# EAGLE board bottom (EAGLE 9.6.1)
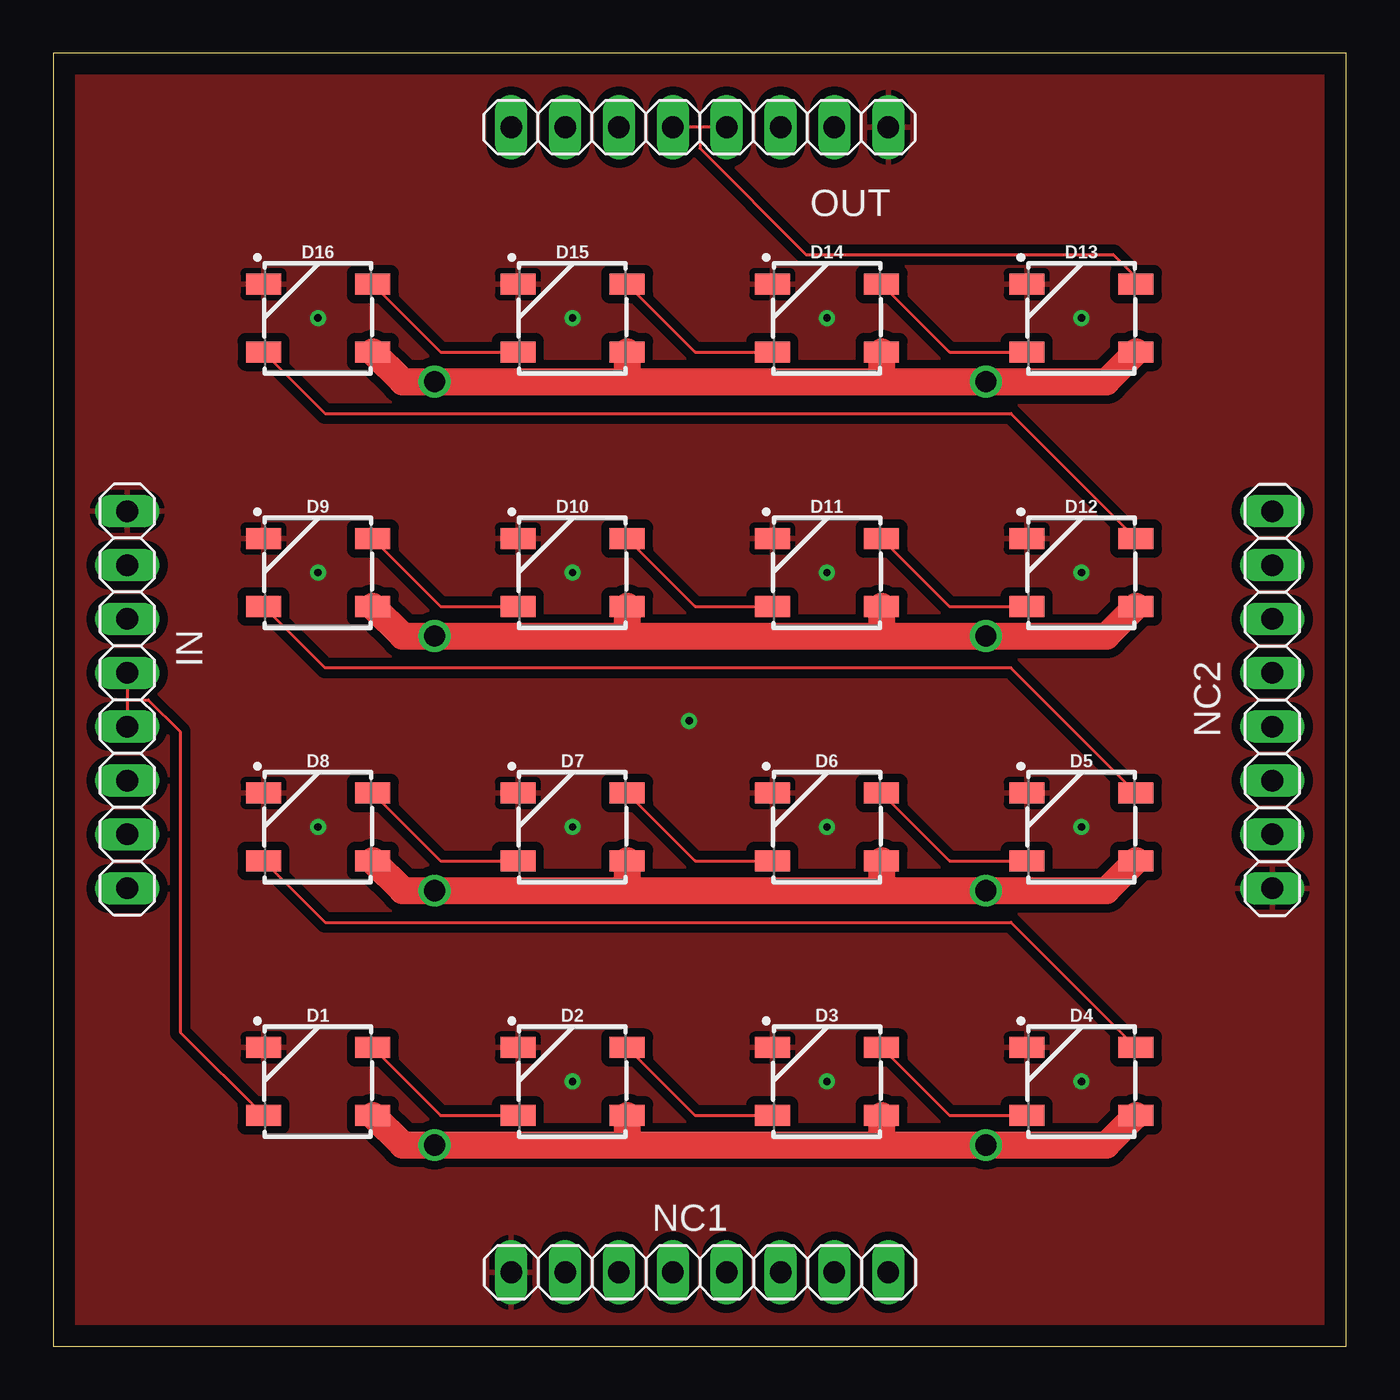
[diagram p0: board, top side]
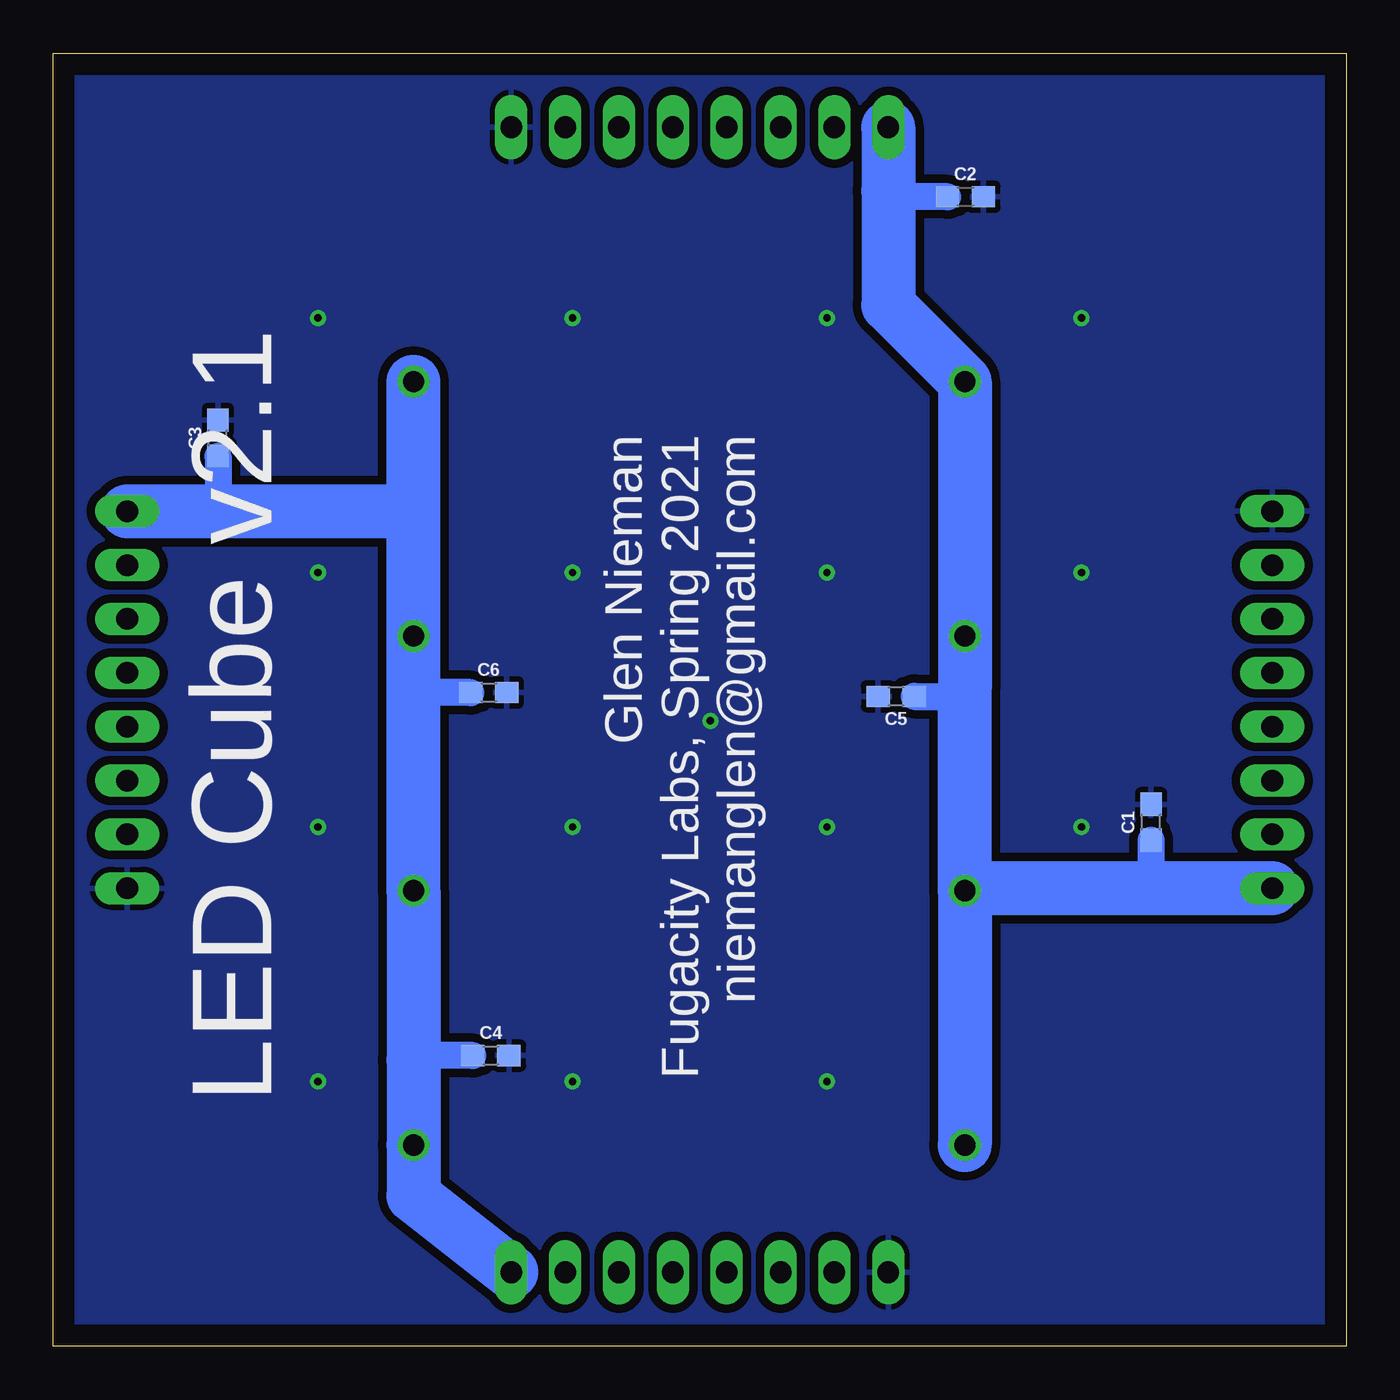
[diagram p1: board, bottom side, seen from below]

Size 61 x 61 mm. Coordinates in mm from the lower left corner, seen from the top.
Outline: 0,0 61,0 61,61 0,61 0,0
Copper layers (1*16): Top 0.035mm / dielectric 1.5mm / Bottom 0.035mm
Design rules "default *": minimum track width 6mil, minimum drill 0.35mm, track to track 6mil, track to pad 6mil, pad to pad 6mil, via to via 6mil, smd to smd 6mil, copper to edge 40mil, drill to drill 6mil, minimum pad ring 10mil, minimum via ring 8mil, stop-mask expansion 4mil, vias tented up to drill 100mil, thermal gap 10mil
Net classes: 1 pow_width: width 0.102 mm

## Footprints (pad centres in the part's own frame; a part is rotated, then mirrored left to right if it is on the bottom)
0603 = smd 1.1 x 1: 1 -0.85,0; 2 0.85,0
WS2812B = smd 1.651 x 1: 1 2.577,-1.6; 2 2.577,1.6; 3 -2.577,1.6; 4 -2.577,-1.6
1X08 = drill 1.016 long: 1 -8.89,0; 2 -6.35,0; 3 -3.81,0; 4 -1.27,0; 5 1.27,0; 6 3.81,0; 7 6.35,0; 8 8.89,0

## Placement (x,y rotation side)
C1  0.1uF  [0603]  9.22,24.72 90 bottom
C2  0.1uF  [0603]  17.97,54.22 0 bottom
C3  0.1uF  [0603]  53.22,42.84 90 bottom
C4  0.1uF  [0603]  40.35,13.72 0 bottom
C5  0.1uF  [0603]  21.24,30.66 180 bottom
C6  0.1uF  [0603]  40.45,30.84 0 bottom
D1  WS2812B  [WS2812B]  12.5,12.5 0 top
D2  WS2812B  [WS2812B]  24.5,12.5 0 top
D3  WS2812B  [WS2812B]  36.5,12.5 0 top
D4  WS2812B  [WS2812B]  48.5,12.5 0 top
D5  WS2812B  [WS2812B]  48.5,24.5 0 top
D6  WS2812B  [WS2812B]  36.5,24.5 0 top
D7  WS2812B  [WS2812B]  24.5,24.5 0 top
D8  WS2812B  [WS2812B]  12.5,24.5 0 top
D9  WS2812B  [WS2812B]  12.5,36.5 0 top
D10  WS2812B  [WS2812B]  24.5,36.5 0 top
D11  WS2812B  [WS2812B]  36.5,36.5 0 top
D12  WS2812B  [WS2812B]  48.5,36.5 0 top
D13  WS2812B  [WS2812B]  48.5,48.5 0 top
D14  WS2812B  [WS2812B]  36.5,48.5 0 top
D15  WS2812B  [WS2812B]  24.5,48.5 0 top
D16  WS2812B  [WS2812B]  12.5,48.5 0 top
IN  [1X08]  3.5,30.5 270 top
NC1  [1X08]  30.5,3.5 0 top
NC2  [1X08]  57.5,30.5 90 top
OUT  [1X08]  30.5,57.5 180 top

## Library data of the parts
C1-C6 = SparkFun-Capacitors; PROD_ID: CAP-08604
D1-D16 = my-LED-cube; PROD_ID: DIO-12503
IN NC1 NC2 OUT = pinhead

## Nets
DI: D1.4 IN.4 IN.5
DO: D13.2 OUT.4 OUT.5
GND: C1.2 C2.2 C3.2 C4.2 C5.2 C6.2 D1.3 D2.3 D3.3 D4.3 D5.3 D6.3 D7.3 D8.3 D9.3 D10.3 D11.3 D12.3 D13.3 D14.3 D15.3 D16.3 IN.1 NC1.1 NC2.1 OUT.1
N$1: D4.2 D8.4
N$2: D7.4 D8.2
N$3: D1.2 D2.4
N$4: D2.2 D3.4
N$5: D3.2 D4.4
N$6: D6.4 D7.2
N$7: D5.2 D9.4
N$8: D12.2 D16.4
N$9: D15.4 D16.2
N$10: D9.2 D10.4
N$11: D10.2 D11.4
N$12: D11.2 D12.4
N$13: D14.4 D15.2
N$14: D13.4 D14.2
N$16: D5.4 D6.2
VDD [pow_width]: C1.1 C2.1 C3.1 C4.1 C5.1 C6.1 D1.1 D2.1 D3.1 D4.1 D5.1 D6.1 D7.1 D8.1 D9.1 D10.1 D11.1 D12.1 D13.1 D14.1 D15.1 D16.1 IN.8 NC1.8 NC2.8 OUT.8

## Tracks (layer width: path | path; a pad name or v marks a point on that pad's centre or on a via)
DI
  Top 0.152: IN.4 3.5,30.5 | 3.5,30.5 IN.5 | 3.5,30.5 4.5,30.5 6,29 6,14.82 D1.4
DO
  Top 0.152: 30.5,57.5 30.5,56.5 35.5,51.5 50,51.5 51.08,50.42 D13.2 | 30.5,57.5 OUT.5 | OUT.4 30.5,57.5
GND  (via drill 0.35)
  other vias: 30,29.5 24.5,12.5 36.5,12.5 48.5,12.5 48.5,24.5 36.5,24.5 12.5,24.5 24.5,24.5 12.5,36.5 24.5,36.5 36.5,36.5 48.5,36.5 48.5,48.5 36.5,48.5 24.5,48.5 12.5,48.5
  pour Top (isolate 0.406): 0,0 0,61 61,61 61,0
  pour Bottom (isolate 0.406): 0,0 0,61 61,61 61,0
N$1
  Top 0.152: D8.4 12.82,20 45.18,20 D4.2
N$2
  Top 0.152: D8.2 18.28,22.9 D7.4
N$3
  Top 0.152: D1.2 18.28,10.9 D2.4
N$4
  Top 0.152: D2.2 30.28,10.9 D3.4
N$5
  Top 0.152: D3.2 42.28,10.9 D4.4
N$6
  Top 0.152: D7.2 30.28,22.9 D6.4
N$7
  Top 0.152: D5.2 45.18,32 12.82,32 D9.4
N$8
  Top 0.152: D16.4 12.82,44 45.18,44 D12.2
N$9
  Top 0.152: D16.2 18.28,46.9 D15.4
N$10
  Top 0.152: D9.2 18.28,34.9 D10.4
N$11
  Top 0.152: D10.2 30.28,34.9 D11.4
N$12
  Top 0.152: D11.2 42.28,34.9 D12.4
N$13
  Top 0.152: D15.2 30.28,46.9 D14.4
N$14
  Top 0.152: D14.2 42.28,46.9 D13.4
N$16
  Top 0.152: D6.2 42.28,22.9 D5.4
VDD  (via drill 1)
  Top 1.27: D16.1 16.48,45.5 v18,45.5 27,45.5 | D13.1 49.68,45.5 v44,45.5 39,45.5 | 27,45.5 39,45.5 | D14.1 39.08,45.58 39,45.5 | D15.1 27.08,45.58 27,45.5 | D9.1 16.48,33.5 v18,33.5 27,33.5 | D12.1 49.68,33.5 v44,33.5 39,33.5 | 27,33.5 39,33.5 | D11.1 39.08,33.58 39,33.5 | D10.1 27.08,33.58 27,33.5 | D8.1 16.48,21.5 v18,21.5 27,21.5 | D5.1 49.68,21.5 v44,21.5 39,21.5 | 27,21.5 39,21.5 | D6.1 39.08,21.58 39,21.5 | D7.1 27.08,21.58 27,21.5 | D1.1 16.48,9.5 v18,9.5 27,9.5 | D4.1 49.68,9.5 v44,9.5 39,9.5 | 27,9.5 39,9.5 | D2.1 27.08,9.58 27,9.5 | D3.1 39.08,9.58 39,9.5
  Bottom 1.27: C2.1 21.33,54.22 21.61,54.5 | C5.1 18.34,30.66 18,31 v18,33.5 | C1.1 9.22,21.83 9,21.61 | C4.1 43.78,13.72 44,13.5 | C6.1 43.66,30.84 44,30.5 | C3.1 53.22,39.61 53,39.39
  Bottom 2.54: v18,21.5 18,31 v18,45.5 21.61,49.11 21.61,54.5 OUT.8 | v18,21.5 v18,9.5 | 44,39.5 44,30.5 44,29 v44,21.5 44,13.5 v44,9.5 44,7.11 NC1.8 | 44,39.5 v44,45.5 | IN.8 9,21.61 17.89,21.61 v18,21.5 | NC2.8 53,39.39 44.11,39.39 44,39.5

## Text on the board
bPlace: LED Cube v2.1 | Glen Nieman / Fugacity Labs, Spring 2021 / niemanglen@gmail.com